# Altium PCB PCB1.PcbDoc
Units mil, origin at the board's own origin, x right, y up, seen from the top; angles counter-clockwise.
Board outline 5870 x 3810 mil, 2 copper layers (Top Layer, Bottom Layer); 10 components, 27 nets, 118 pads, 43 vias.
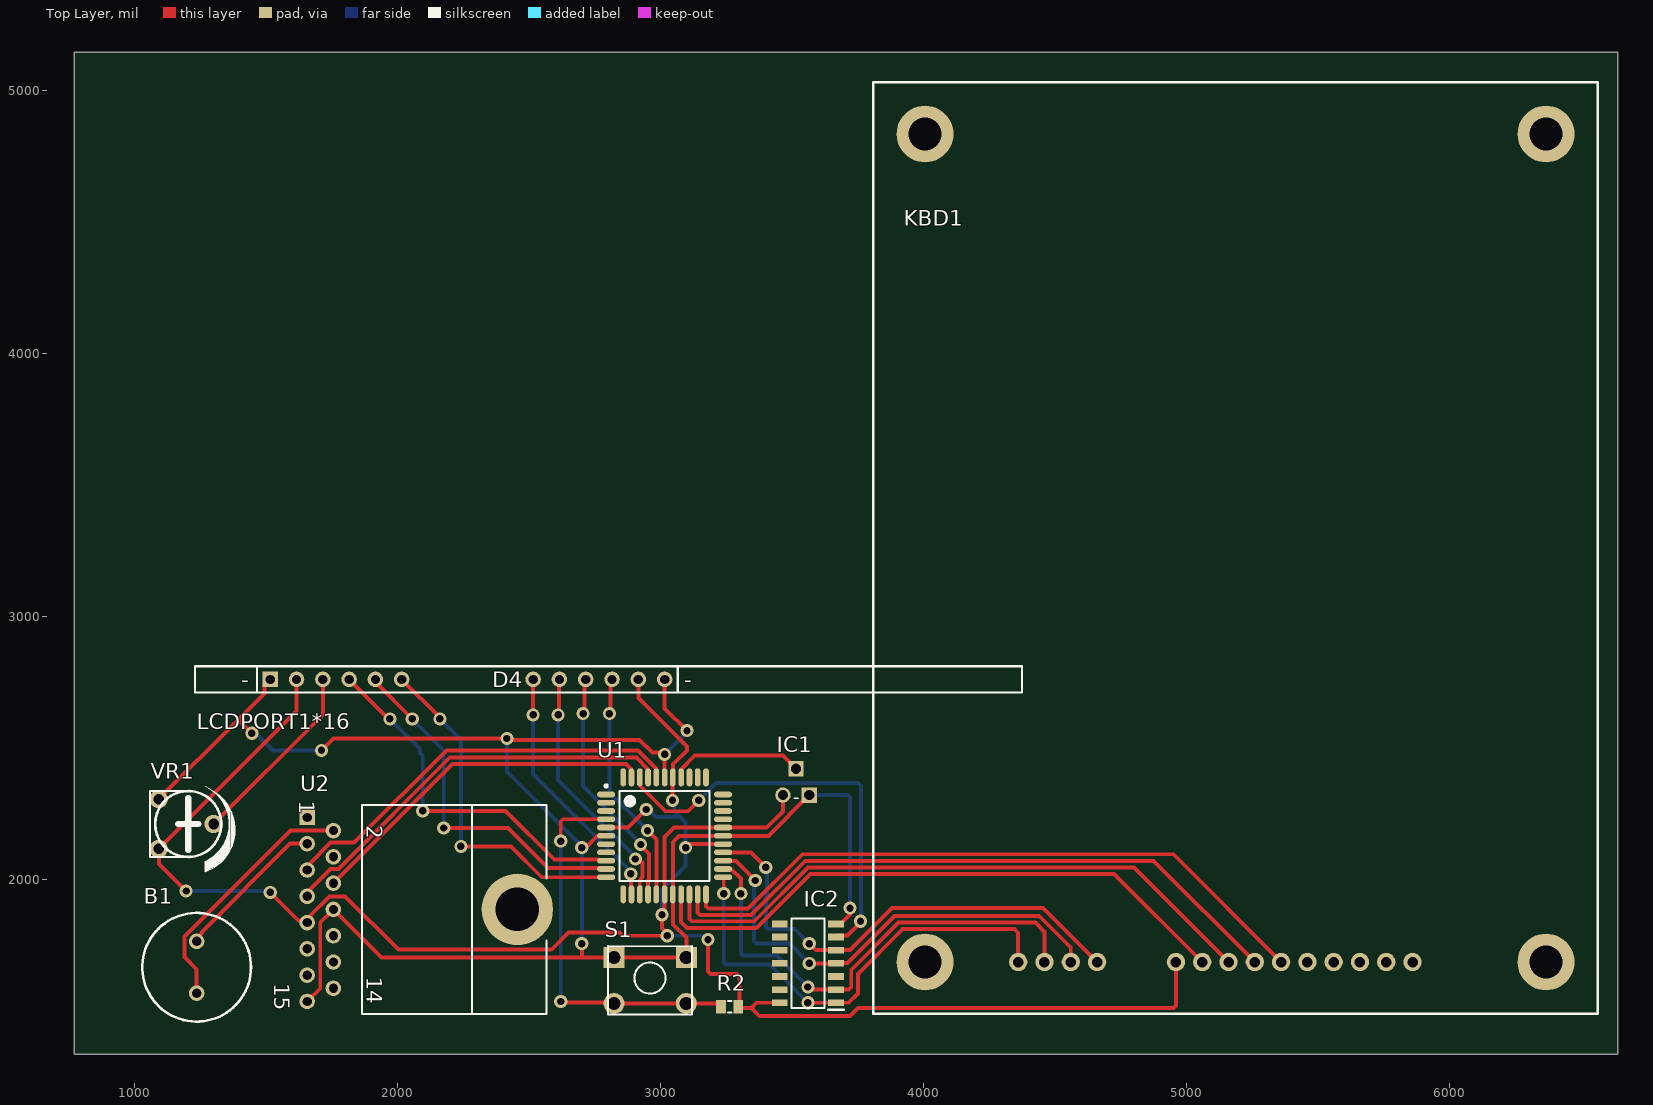
[diagram p0: Top Layer view]
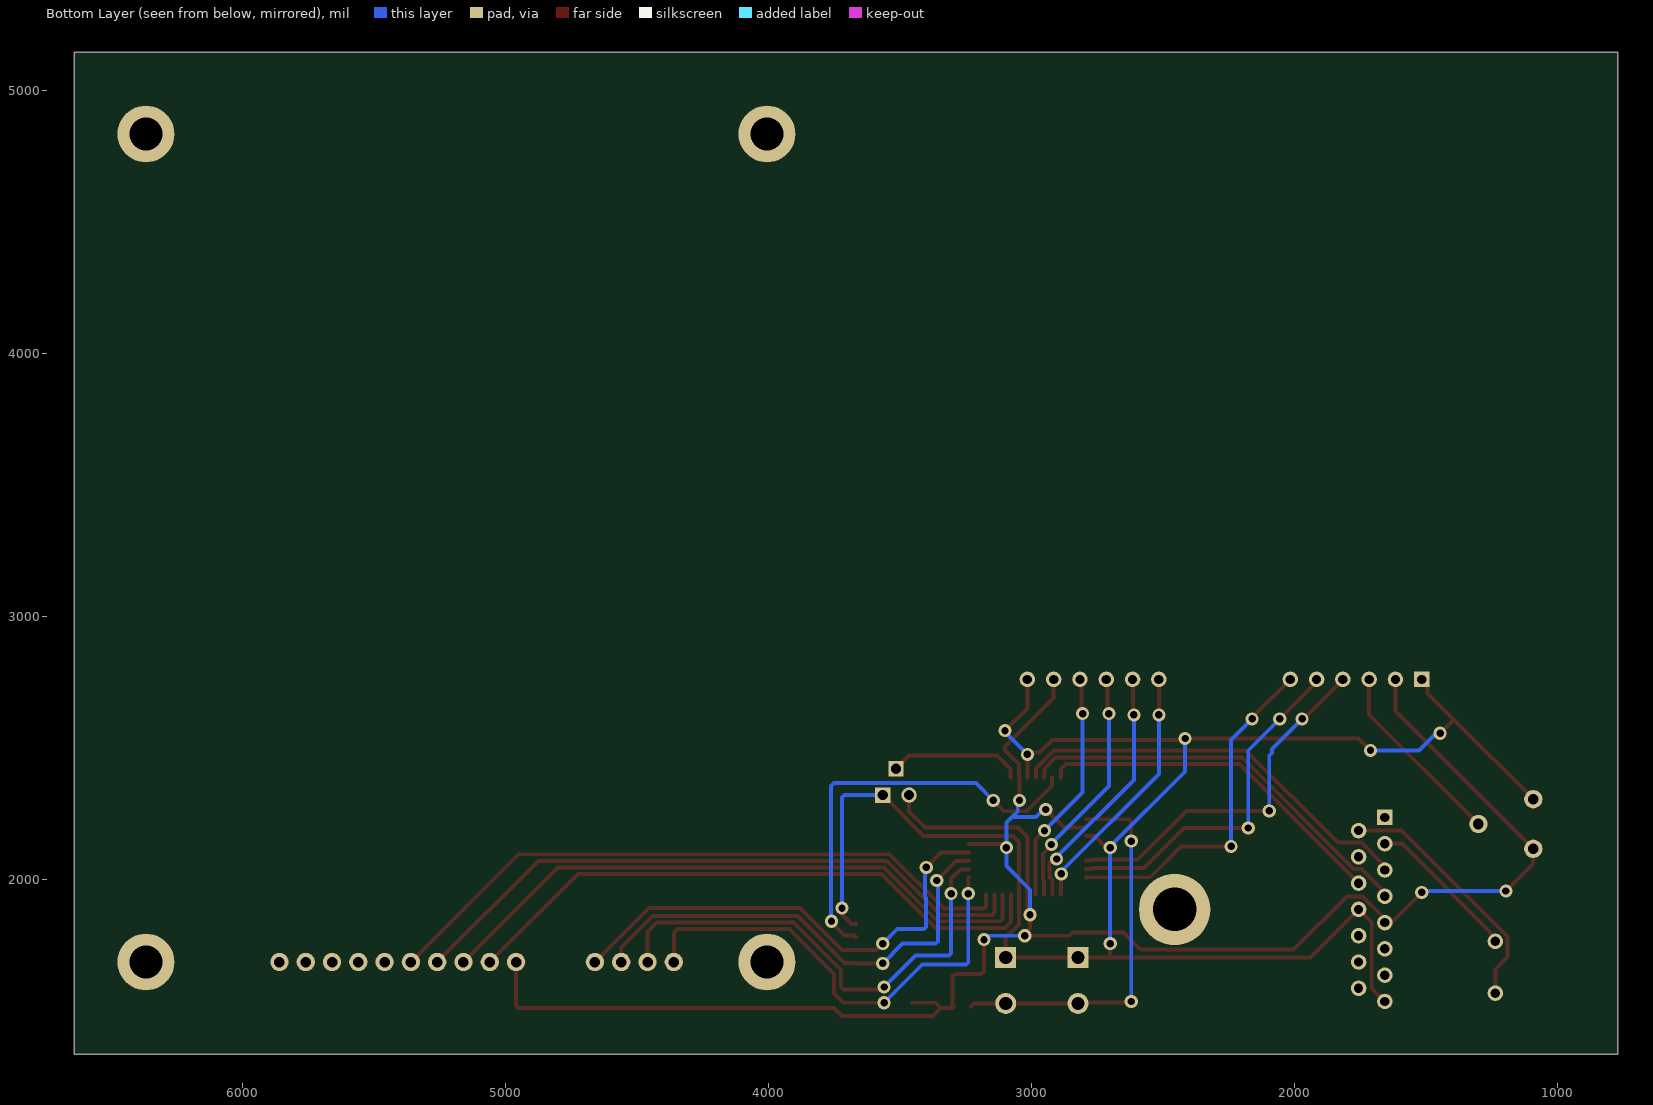
[diagram p1: Bottom Layer view, seen from below]

## Layer stack, top to bottom
Top Solder: solder mask 0.4, Solder Resist, Dk 3.5
Top Layer: signal copper 1.4
Dielectric 1: dielectric 12.6, FR-4, Dk 4.8
Bottom Layer: signal copper 1.4
Bottom Solder: solder mask 0.4, Solder Resist, Dk 3.5

## Board outline
770,1335 6640,1335 6640,5145 770,5145

## Design rules (kind name [scope] priority, off if disabled: settings)
Clearance [All] p1: gap=9 ignorepadtopadclearanceinfootprint=FALSE
ComponentClearance [All] p1: gap=0 collisioncheckmode=3 verticalgap=0 showdistances=FALSE
HoleSize [All] p1: absolutevalues=TRUE maxlimit=1000 minlimit=0 maxpercent=80.000 minpercent=20.000
HoleToHoleClearance [All] p1: gap=0 allowstackedmicrovias=TRUE
MinimumSolderMaskSliver [All] p1: minsoldermaskwidth=0
PolygonConnect [All] p1: connectstyle=Relief reliefconductorwidth=10 reliefentries=4 polygonreliefangle="90 Angle" airgapwidth=10
RoutingVias [All] p1: holewidth=28 width=50 viastyle="Through Hole" minholewidth=28 minwidth=50 maxholewidth=28 maxwidth=50
SilkToSilkClearance [All] p1: silktosilkclearance=0
SilkToSolderMaskClearance [IsPad] p1: minsilkscreentomaskgap=0 clearancetoexposedcopper=TRUE
SolderMaskExpansion [All] p1: expansion=4 istentingtop=FALSE
Width [All] p1: maxlimit=20 minlimit=10 preferedwidth=10
24 further rules are at their usual default settings.

## Classes and differential pairs
component class Sheet1: B1 IC1 IC2 LCDPORT1*16 R2 S1 U1 VR1

## Components (designator, comment, footprint, x,y, rotation, side; value= is the part's Value field where it differs from the comment)
B1 "Motor" RB5-10.5 1235,1665 r90 top
IC1 "LM35CZ" TO127P254X495-3P 3565,2420 r0 top
IC2 "SN74LV21ADR" SOIC127P600X175-14N 3560,1680 r180 top
KBD1 "Keyboard" Keyboard 4360,1685 r0 top
LCDPORT1*16 "LCDPORT1*16" HDR1X16 1225,2760 r0 top
R2 "1K" "RES 0805 (2012X06L)" 3230,1515 r0 top
S1 "Switch PB" "Switch - Push to On" 2960,1615 r0 top
U1 "ATmega16-16AU" 44A_N 3015,2165 r0 top
U2 "L298N" Multiwatt15H 2055,1885 r270 top
VR1 "1K" "Pot 00" 1195,2210 r270 top

## Footprints (in the part's own frame and the unit in brackets; to place one, negate y for a bottom-side part, rotate by r counter-clockwise, add the part's x,y. Pads: shape width x height; smd on the part's side, far side on the other; paste and mask are expansions set on the pad)
44A_N [mm] "Thin QFP, 44-Leads, Body 10x10mm, Pitch 0.8mm, IPC Medium Density"
  oval 1.75x0.55 smd: 1(-5.65,4) 2(-5.65,3.2) 3(-5.65,2.4) 4(-5.65,1.6) 5(-5.65,0.8) 6(-5.65,0) 7(-5.65,-0.8) 8(-5.65,-1.6) 9(-5.65,-2.4) 10(-5.65,-3.2) 11(-5.65,-4) 23(5.65,-4) 24(5.65,-3.2) 25(5.65,-2.4) 26(5.65,-1.6) 27(5.65,-0.8) 28(5.65,0) 29(5.65,0.8) 30(5.65,1.6) 31(5.65,2.4) 32(5.65,3.2) 33(5.65,4)
  oval 0.55x1.75 smd: 12(-4,-5.65) 13(-3.2,-5.65) 14(-2.4,-5.65) 15(-1.6,-5.65) 16(-0.8,-5.65) 17(0,-5.65) 18(0.8,-5.65) 19(1.6,-5.65) 20(2.4,-5.65) 21(3.2,-5.65) 22(4,-5.65) 34(4,5.65) 35(3.2,5.65) 36(2.4,5.65) 37(1.6,5.65) 38(0.8,5.65) 39(0,5.65) 40(-0.8,5.65) 41(-1.6,5.65) 42(-2.4,5.65) 43(-3.2,5.65) 44(-4,5.65)
  silkscreen extent -5.77,-4.35 4.35,4.95, body extent -5,-5 5,5, height 1.2
HDR1X16 [mm] "LCD; Connector; Header; 16 Position"
  rect 1.5x1.5 hole 0.9: 1(7.366,0)
  round 1.5 hole 0.9: 2(9.906,0) 3(12.446,0) 4(14.986,0) 5(17.526,0) 6(20.066,0) 11(32.766,0) 12(35.306,0) 13(37.846,0) 14(40.386,0) 15(42.926,0) 16(45.466,0)
  silkscreen extent 0.1,-1.27 80,1.27
Keyboard [mil] "Matrix Keyboard 4x4"
  round 70 hole 40: 1(0,0) 2(100,0) 3(200,0) 4(300,0) 5(700,0) 6(800,0) 7(900,0) 8(1000,0) 9(600,0) 10(1100,0) 11(1200,0) 12(1300,0) 13(1400,0) 14(1500,0)
  round 216.54 hole 125.98: MH0(-354.33,0) MH1(2007.87,0) MH2(2007.87,3149.61) MH3(-354.33,3149.61)
  silkscreen extent -551,-197 2205,3346, body extent -551,-197 2205,3346, height 875
Multiwatt15H [mm] "TO, Thru-Hole, Horizontal, Heatsink Mounted; 15 Bent Staggered Leads; Pitch 1.27 mm"
  rect 1.5x1.5 hole 0.9: 1(-8.89,-10.155)
  round 1.5 hole 0.9: 2(-7.62,-7.615) 3(-6.35,-10.155) 4(-5.08,-7.615) 5(-3.81,-10.155) 6(-2.54,-7.615) 7(-1.27,-10.155) 8(0,-7.615) 9(1.27,-10.155) 10(2.54,-7.615) 11(3.81,-10.155) 12(5.08,-7.615) 13(6.35,-10.155) 14(7.62,-7.615) 15(8.89,-10.155)
  round 6.9 hole 4.2: 16(0,10.155)
  silkscreen extent -10.1,-4.84 10.1,12.96
"Pot 00" [mil]
  round 70 hole 40: 1(-94.49,-104.33) 2(94.49,-104.33) 3(0,104.33)
  silkscreen extent -141,-138 181,187, body extent -125,-144 127,145, height 183
RB5-10.5 [mm] "Capacitor (Radial); 2 Leads"
  round 1.5 hole 0.9: 1(-2.5,0) 2(2.5,0)
  silkscreen extent -5.25,-5.25 5.25,5.25
"RES 0805 (2012X06L)" [mm] "Chip Resistor, 2-Leads, Body 2.0x1.3mm, IPC High Density _ (0.100 W)"
  rect 0.95x1.3 smd: 1(0,0) 2(1.65,0)
  silkscreen extent 0.67,-0.55 0.97,0.55, body extent -0.19,-0.63 1.84,0.64, height 0.6
SOIC127P600X175-14N [mm]
  rect 1.525x0.65 smd: 1(-2.712,3.81) 2(-2.712,2.54) 3(-2.712,1.27) 4(-2.712,0) 5(-2.712,-1.27) 6(-2.712,-2.54) 7(-2.712,-3.81) 8(2.712,-3.81) 9(2.712,-2.54) 10(2.712,-1.27) 11(2.712,0) 12(2.712,1.27) 13(2.712,2.54) 14(2.712,3.81)
  silkscreen extent -3.47,-4.33 1.6,4.48, body extent -3.01,-4.32 3.01,4.34, height 1.75
"Switch - Push to On" [mil]
  rect 80x80 hole 50: 1(-137.5,87.5) 1(137.5,87.5)
  round 80 hole 50: 2(-137.5,-87.5) 2(137.5,-87.5)
  silkscreen extent -160,-130 160,130, body extent -155,-121 157,123, height 205
TO127P254X495-3P [mil]
  round 58.5 hole 39: 1(-100,-100)
  rect 58.5x58.5 hole 39: 2(-50,0) 3(0,-100)
  silkscreen extent -57,-112 -41,-112

## Part data
B1: "Motor, General Kind", LatestRevisionDate=17-Jul-2002, LatestRevisionNote="Re-released for DXP Platform.", PackageDescription="Capacitor (Radial); 2 Leads", PackageReference=RB5-10.5, Published=24-Mar-1999, Publisher="Altium Limited"
IC1: "Integrated Circuit", Manufacturer_Name="Texas Instruments", Mouser Part Number=926-LM35CZ, Manufacturer_Part_Number=LM35CZ, Mouser Price/Stock=https://www.mouser.co.uk/ProductDetail/Texas-Instruments/LM35CZ?qs=QbsRYf82W3GOOtuH6W%2F42g%3D%3D
IC2: "Integrated Circuit", Manufacturer_Name="Texas Instruments", Mouser Part Number=595-SN74LV21ADR, Datasheet Link=http://www.ti.com/lit/gpn/sn74lv21a, Height=1.75mm, Manufacturer_Part_Number=SN74LV21ADR, Mouser Price/Stock=https://www.mouser.co.uk/ProductDetail/Texas-Instruments/SN74LV21ADR?qs=q81XD9WTF%252BKhk1xwG%2Fa4dw%3D%3D
KBD1: library part "Keyboard Matrix 4x4", Adding Date=10/21/2009, Company=Personal, Designer="Saeid Jorablo", Project Name=Abtahi
LCDPORT1*16: library part "LCDPORT 1*16", "LCDPORT 1*16; 80mm*36mm", ComponentLinkURL=www.picpars.com, Designer="Seyed Mohsen Ghasemain"
R2: library part Resistor, "Resistor", Tolerance=5%
S1: "Push Button Switch"
U1: "8-bit AVR Microcontroller, 4.5-5.5V, 16KB Flash, 512 Bytes EEPROM, 1KB SRAM, 44-pin TQFP, Industrial Grade (-40°C to 85°C), Pb-Free", Code_JEDEC=MS-026-ACB, ComponentLink1Description="Manufacturer URL", ComponentLink1URL=http://www.atmel.com/, ComponentLink2Description="ATmega16(L)  Datasheet", ComponentLink2URL=http://www.atmel.com/dyn/resources/prod_documents/doc2466.pdf, ComponentLink3Description="ATmega16(L) Summary", ComponentLink3URL=http://www.atmel.com/dyn/resources/prod_documents/2466S.pdf, DatasheetVersion="revT, Jul-2010", PackageDescription="44-Pin Plastic Thin Profile Quad Flat Pack, 10 x 10 x 1.0 mm Body, 0.8 mm Pitch (TQFP)", PackageReference=44A, PackageVersion="revC, Oct-2010"
U2: "Dual Full Bridge Driver", Package Information="Latest Revision: Apr-1998", Package Reference=Multiwatt15H, Datasheet="Latest Revision: Jul-1999", Published=8-Jun-2000, Publisher="Altium Limited", Revision 1="24-Aug-2001: Footprint Added.", Revision 2="17-Jul-2002: Re-released for DXP Platform."
VR1: library part "Resistor Variable", "Variable Resistor", Adding Date=137/12/22, Company=ControTec, Designer="Saeid Jorablo"

## Via types
v1: diameter 50, hole 28, Top Layer to Bottom Layer, 43 vias

## Nets (pads, with @x,y where several pads share a name; then routed paths per layer and width w, separated by ;. In a path a pad name is that pad's centre, name@x,y a point inside that pad or via, vN(x,y) a via of type N, cw(c..) or ccw(c..) an arc to the next point about the centre after c; other vN are vias at no path point)
+5: IC1.1 IC2.14 KBD1.9 LCDPORT1*16.2 LCDPORT1*16.15 R2.2 U1.5 U1.17 U1.27 U1.29 U1.38 U2.9 VR1.2 | length 8081.7
  Top Layer w15: v1(1195,1955) 1091.99,2058.01 1091.99,2114.19 VR1.2 1615,2639.84 LCDPORT1*16.2 ; v1(1515,1950) 1621.57,1843.43 1646.77,1843.43 U2.9 1655.2,1846.92 1668.97,1860.7 1668.97,1863.87 1740.1,1935 1800,1935 2002.33,1732.67 2585.65,1732.67 2649.48,1796.5 2843.42,1796.5 2854.92,1785 v1(3025,1785) 3025,1795 3005,1815 v1(3005,1865) 3015,1875 U1.17 3015,2160 3051.5,2196.5 U1.29 3403.5,2196.5 3465,2257.99 IC1.1 ; U1.5 2876.5,2196.5 v1(2945,2265) ; LCDPORT1*16.15 2915,2690 3100,2505 3100,2490 3047.77,2437.77 3047.77,2388.71 U1.38 3045.75,2386.69 3045.75,2300.75 v1(3045,2300) ; v1(3095,2120) 3108.5,2133.5 U1.27 ; v1(3180,1770) 3180,1648.79 3188.79,1640 3291.21,1640 3300,1631.21 3300,1520.04 R2.2 3299.96,1510 3345,1510 ; IC2.14 3365,1530 3345,1510 ; KBD1.9 4960,1518.79 4951.21,1510 3750,1510 3720,1480 3375,1480 3345,1510
  Bottom Layer w15: v1(1195,1955) 1505,1955 1510,1950 v1(1515,1950) ; v1(2945,2265) 2954.47,2265 2982.82,2236.65 3073.35,2236.65 ; v1(3005,1865) 3005,1960 3095,2050 v1(3095,2120) 3095,2215 3073.35,2236.65 ; v1(3025,1785) 3171.21,1785 3180,1776.21 v1(3180,1770) ; v1(3045,2300) 3051.7,2293.3 3051.7,2258.3 3073.35,2236.65
+12: U2.4
GND: IC1.3 IC2.7 LCDPORT1*16.1 LCDPORT1*16.16 S1.1 U1.6 U1.18 U1.28 U1.39 U2.8 U2.15 VR1.1 | length 7386.2
  Top Layer w15: VR1.1 1390.59,2604.41 ; v1(1445,2555) 1395.59,2604.41 1390.59,2604.41 ; LCDPORT1*16.1 1492.97,2737.97 1492.97,2706.79 1390.59,2604.41 ; U2.15 1705.2,1585 1705.2,1835 U2.8 1937.7,1702.5 2700,1702.5 ; v1(1710,2490) 1755,2535 v1(2415,2535) 2420,2535 2425,2530 2920,2530 2968.3,2481.7 3008.3,2481.7 v1(3015,2475) U1.39 ; v1(2700,1755) 2700,1702.5 ; v1(2700,2120) 2701.29,2118.71 2713.71,2118.71 2758.73,2163.73 2791.29,2163.73 U1.6 ; LCDPORT1*16.16 3015,2650 v1(3100,2565) ; v1(3565,2320) 3410,2165 U1.28 3070,2165 3046.5,2141.5 3046.5,1882.19 3046.5,1828.5 3097.5,1777.5 3097.5,1702.5 2822.5,1702.5 2700,1702.5 ; IC2.7 3684,1830 3720,1866 v1(3720,1890)
  Bottom Layer w15: v1(1445,2555) 1460,2555 1525,2490 v1(1710,2490) ; v1(2415,2535) 2415,2408.69 2700,2123.69 v1(2700,2120) v1(2700,1755) ; v1(3015,2475) 3100,2560 v1(3100,2565) ; v1(3565,2320) 3711.21,2320 3720,2311.21 v1(3720,1890)
NetB1_1: B1.1 U2.2 | length 967.9
  Top Layer w15: B1.1 1235,1657.48 1188.97,1703.51 1188.97,1782.49 1591.48,2185 U2.2
NetB1_2: B1.2 U2.3 | length 583.8
  Top Layer w15: B1.2 1235,1775.35 1255,1795.35 1255,1800 1590,2135 U2.3
NetLCDPORT1*16_3: LCDPORT1*16.3 VR1.3 | length 722.2
  Top Layer w15: VR1.3 1715,2625.67 LCDPORT1*16.3
NetR2_1: R2.1 S1.2 U1.4 | length 1479.4
  Top Layer w15: v1(2620,1535) 2623.75,1531.25 2818.75,1531.25 2822.5,1527.5 3097.5,1527.5 3218.8,1527.5 3230,1516.3 R2.1 ; v1(2620,2145) 2620,2219.21 2628.79,2227.99 U1.4
  Bottom Layer w15: v1(2620,1535) v1(2620,2145)
PA0: IC1.2 U1.37 | length 509.9
  Top Layer w15: U1.37 3079.27,2388.71 3079.27,2419.49 3129.78,2470 3465,2470 IC1.2
PB0: U1.40 U2.5 | length 1587.6
  Top Layer w15: U2.5 1663.63,2043.43 1663.63,2058.52 1744.08,2138.97 1833.97,2138.97 2185,2490 2914.16,2490 2982.23,2421.93 2982.23,2388.71 U1.40
PB1: U1.41 U2.7 | length 1573.2
  Top Layer w15: U2.7 1663.63,1943.43 1663.63,1958.52 1744.08,2038.97 1774.26,2038.97 2197.68,2462.39 2907.83,2462.39 2950.73,2419.49 2950.73,2388.71 U1.41
PB2: IC2.6 U1.42 | length 1597.8
  Top Layer w15: U1.42 2921.78,2386.17 2921.78,2355.4 3018.68,2258.5 3103.5,2258.5 v1(3145,2300) ; IC2.6 3672.07,1785.3 3710.3,1785.3 3760,1835 v1(3760,1840)
  Bottom Layer w15: v1(3145,2300) 3210.75,2365.75 3750.46,2365.75 3761.5,2354.71 3761.5,1841.5 v1(3760,1840)
PB3: U1.43 U2.6 | length 1360.7
  Top Layer w15: U2.6 2208.59,2438.39 2868.84,2438.39 2887.74,2419.49 2887.74,2388.71 U1.43
PC0: KBD1.5 U1.19 | length 2320.4
  Top Layer w15: U1.19 3077.99,1837.01 3100,1815 3365,1815 3570,2020 4725,2020 KBD1.5
PC1: KBD1.6 U1.20 | length 2382
  Top Layer w15: U1.20 3109.49,1848.79 3118.28,1840 3356.06,1840 3561.06,2045 4800,2045 KBD1.6
PC2: KBD1.7 U1.21 | length 2438.6
  Top Layer w15: U1.21 3140,1941.57 3140,1872.79 3148.79,1864 3344,1864 3550,2070 4875,2070 KBD1.7
PC3: KBD1.8 U1.22 | length 2492.5
  Top Layer w15: U1.22 3172.48,1896.79 3181.27,1888 3333,1888 3540,2095 4950,2095 KBD1.8
PC4: IC2.1 KBD1.1 U1.23 | length 1785.1
  Top Layer w15: U1.23 3240,2004.96 v1(3240,1945) ; v1(3560,1530) IC2.1 3715,1530 3750,1565 3750,1640 3919.77,1809.77 4346.45,1809.77 4360,1796.21 KBD1.1
  Bottom Layer w15: v1(3240,1945) 3240,1683.79 3248.79,1675 3415,1675 v1(3560,1530)
PC5: IC2.2 KBD1.2 U1.24 | length 1851.9
  Top Layer w15: U1.24 3238.71,2037.74 3269.49,2037.74 3305,2002.23 v1(3305,1945) ; v1(3560,1590) 3570,1580 IC2.2 3715,1580 3725,1590 3725,1655 3905,1835 4425,1835 4460,1800 KBD1.2
  Bottom Layer w15: v1(3305,1945) 3305,1718.79 3313.79,1710 3440,1710 v1(3560,1590)
PC6: IC2.4 KBD1.3 U1.25 | length 1806.1
  Top Layer w15: U1.25 3238.71,2069.24 3285.76,2069.24 v1(3360,1995) ; v1(3565,1680) IC2.4 3667.28,1680.5 3710.5,1680.5 3890,1860 4440,1860 4560,1740 KBD1.3
  Bottom Layer w15: v1(3360,1995) 3355,1990 3355,1763.79 3363.79,1755 3490,1755 v1(3565,1680)
PC7: IC2.5 KBD1.4 U1.26 | length 1864.5
  Top Layer w15: U1.26 3342.99,2102.01 v1(3400,2045) ; v1(3565,1755) 3590,1730 IC2.5 3720,1730 3880,1890 4455,1890 KBD1.4
  Bottom Layer w15: v1(3400,2045) 3405,2040 3405,1934.39 3400,1929.39 3400,1818.79 3408.79,1810 3510,1810 v1(3565,1755)
PD0: LCDPORT1*16.4 U1.9 | length 1395
  Top Layer w15: LCDPORT1*16.4 1965,2610 v1(1970,2610) ; v1(2095,2260) 2410,2260 2595.32,2074.68 2762.97,2074.68 2767.14,2070.51 U1.9
  Bottom Layer w15: v1(1970,2610) 2085,2495 2085,2480 2095,2470 v1(2095,2260)
PD1: LCDPORT1*16.5 U1.10 | length 1354.9
  Top Layer w15: LCDPORT1*16.5 1915,2750 v1(2055,2610) ; v1(2175,2195) 2420,2195 2571.81,2043.19 2762.97,2043.19 2767.14,2039.02 U1.10
  Bottom Layer w15: v1(2055,2610) 2175,2490 v1(2175,2195)
PD2: LCDPORT1*16.6 U1.11 | length 1331.2
  Top Layer w15: LCDPORT1*16.6 2160,2615 v1(2160,2610) ; v1(2240,2125) 2430.23,2125 2547.71,2007.52 2788.21,2007.52 2790.39,2005.35 U1.11
  Bottom Layer w15: v1(2160,2610) 2240,2530 v1(2240,2125)
PD4: LCDPORT1*16.11 U1.13 | length 972.4
  Top Layer w15: v1(2515,2625) LCDPORT1*16.11 ; v1(2886.3,2020.32) 2887.74,2018.88 2887.74,1943.83 U1.13
  Bottom Layer w15: v1(2515,2625) 2515,2400 2886.3,2028.7 v1(2886.3,2020.32)
PD5: LCDPORT1*16.12 U1.14 | length 965.8
  Top Layer w15: v1(2610,2625) 2612.5,2627.5 2612.5,2757.5 LCDPORT1*16.12 ; v1(2903.63,2076.71) 2913.1,2076.71 2926.32,2063.5 2931.5,2063.5 2931.5,2007.81 2920.51,1996.82 U1.14
  Bottom Layer w15: v1(2610,2625) 2610,2377.44 2903.63,2083.81 v1(2903.63,2076.71)
PD6: LCDPORT1*16.13 U1.15 | length 926.8
  Top Layer w15: v1(2705,2630) 2710,2635 2710,2755 LCDPORT1*16.13 ; v1(2923.61,2132.23) 2923.61,2128.82 2955.5,2096.94 2955.5,1997.87 2952.01,1994.38 U1.15
  Bottom Layer w15: v1(2705,2630) 2705,2355 2923.61,2136.39 v1(2923.61,2132.23)
PD7: LCDPORT1*16.14 U1.16 | length 895.5
  Top Layer w15: v1(2805,2630) 2810,2635 2810,2755 LCDPORT1*16.14 ; v1(2950,2185) 2983.5,2151.5 U1.16
  Bottom Layer w15: v1(2805,2630) 2805,2330 v1(2950,2185)
pads on no net: IC2.3 IC2.8 IC2.9 IC2.10 IC2.11 IC2.12 IC2.13 KBD1.10 KBD1.11 KBD1.12 KBD1.13 KBD1.14 KBD1.MH0 KBD1.MH1 KBD1.MH2 KBD1.MH3 U1.1 U1.2 U1.3 U1.7 U1.8 U1.12 U1.30 U1.31 U1.32 U1.33 U1.34 U1.35 U1.36 U1.44 U2.1 U2.10 U2.11 U2.12 U2.13 U2.14 U2.16

## Text inside footprints (layer, text, board x,y; h text height)
LCDPORT1*16: Top Overlay "D4" at 2360,2730 h60; Top Overlay "-" at 3090,2730 h60; Top Overlay "-" at 1405,2730 h60
U2: Top Overlay "1" at 1625.67,2298.98 h59.06 r270; Top Overlay "15" at 1530,1605 h59.06 r270; Top Overlay "14" at 1882.95,1629.29 h59.06 r270; Top Overlay "2" at 1882.95,2204.69 h59.06 r270